# Altium PCB PCB2.PcbDoc
Units mil, origin at the board's own origin, x right, y up, seen from the top; angles counter-clockwise.
Board outline 2716.54 x 2401.57 mil, 2 copper layers (Top Layer, Bottom Layer); 22 components, 27 nets, 123 pads, 29 vias.
Unrouted connection lines stored in the file: 2.
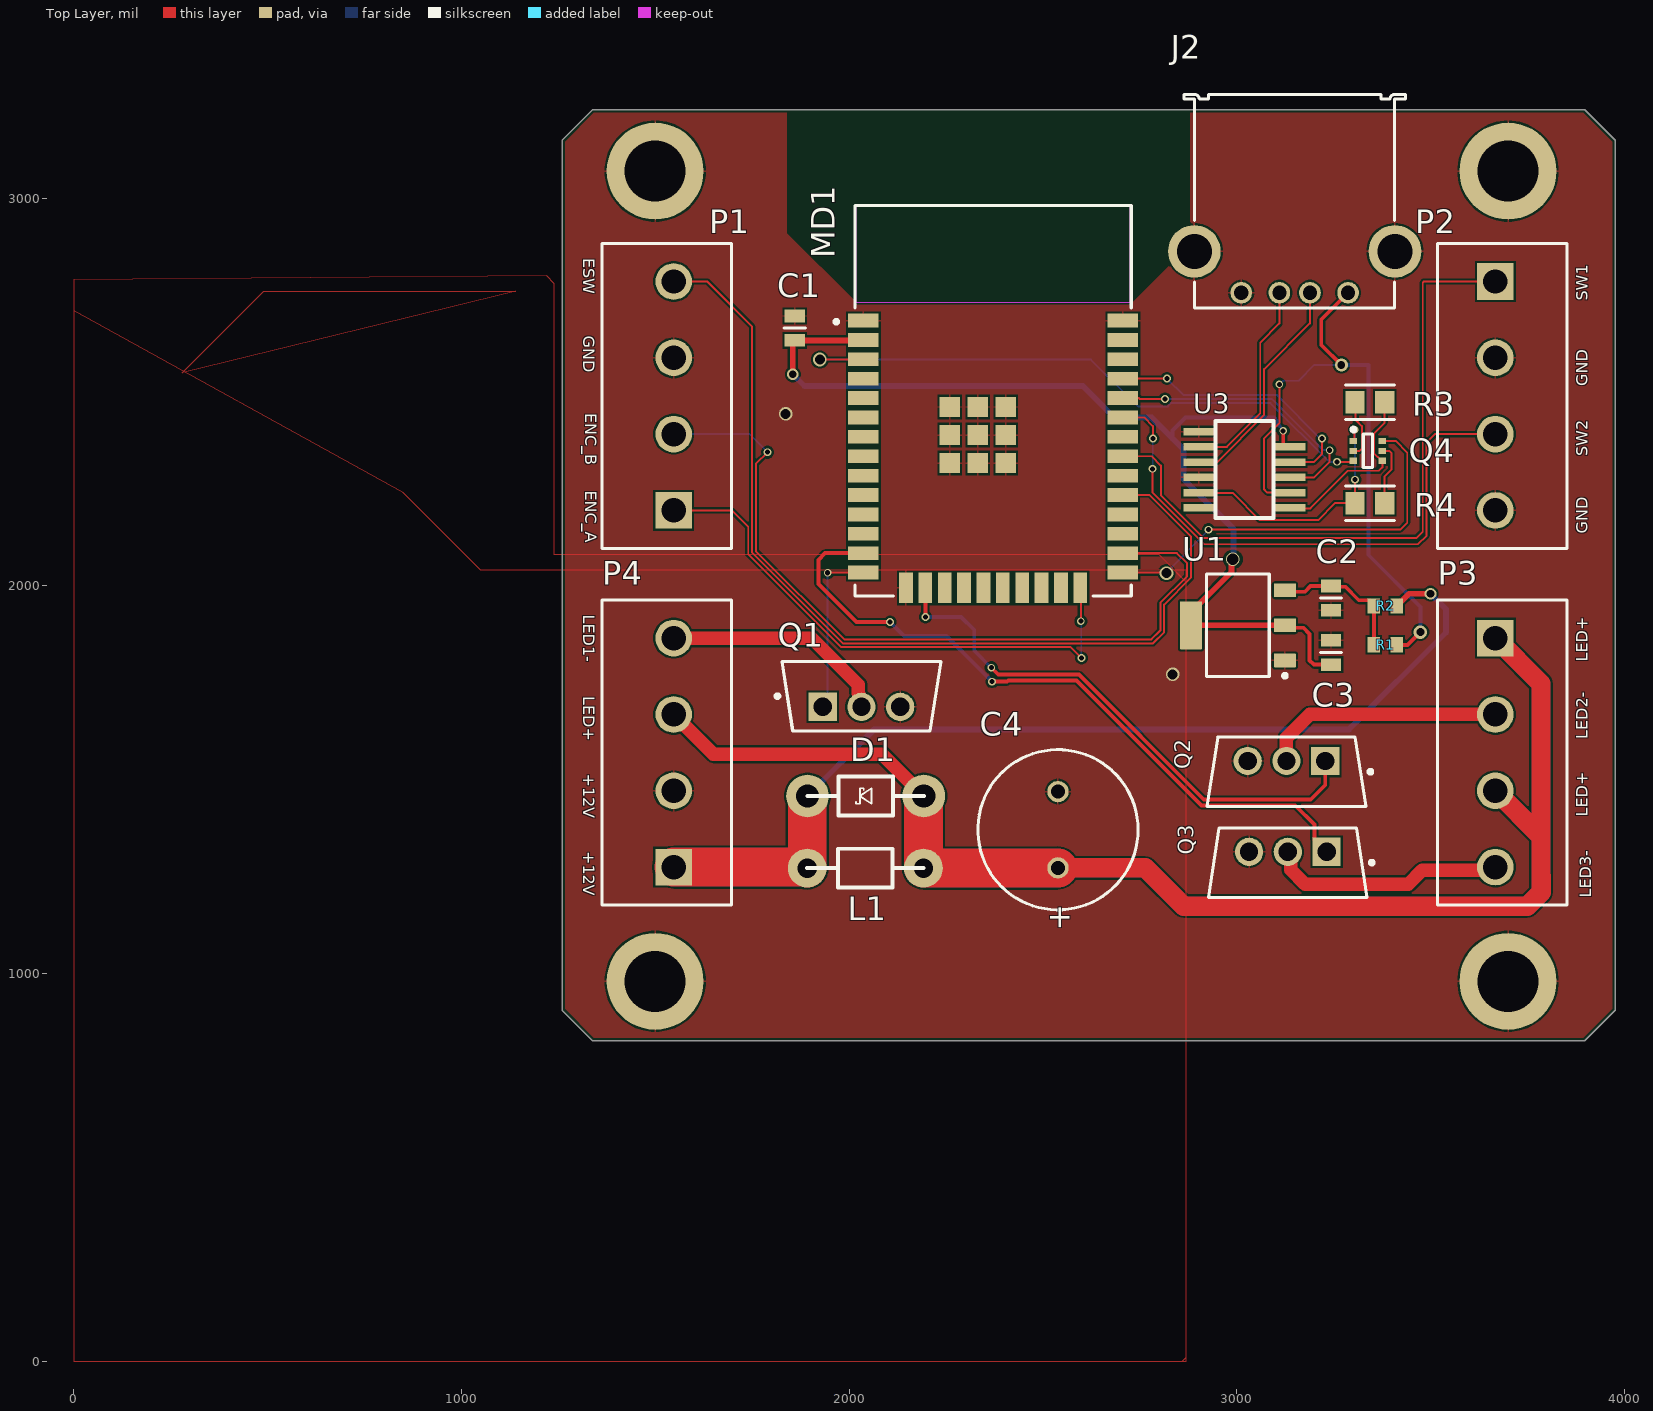
[diagram p0: Top Layer view]
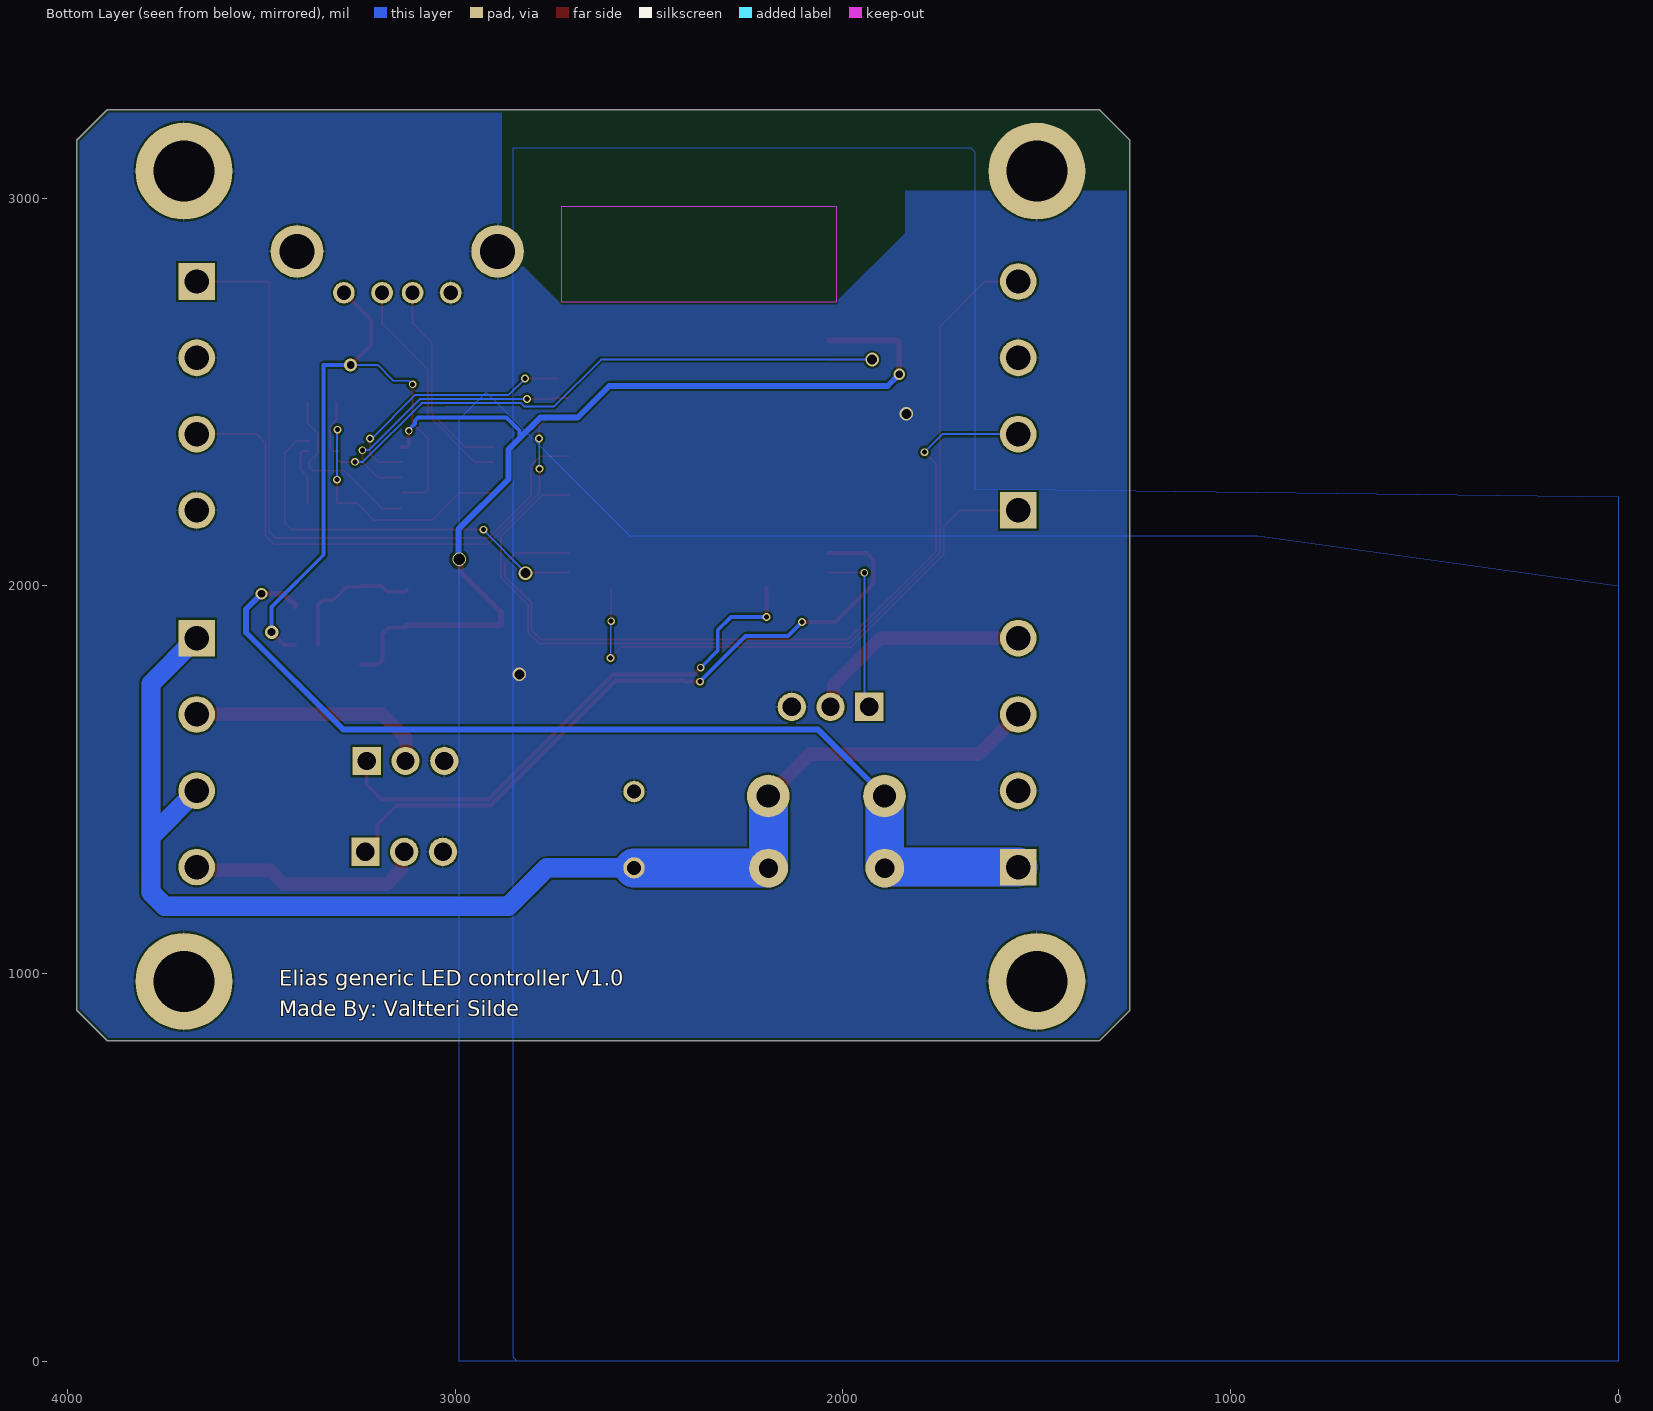
[diagram p1: Bottom Layer view, seen from below]
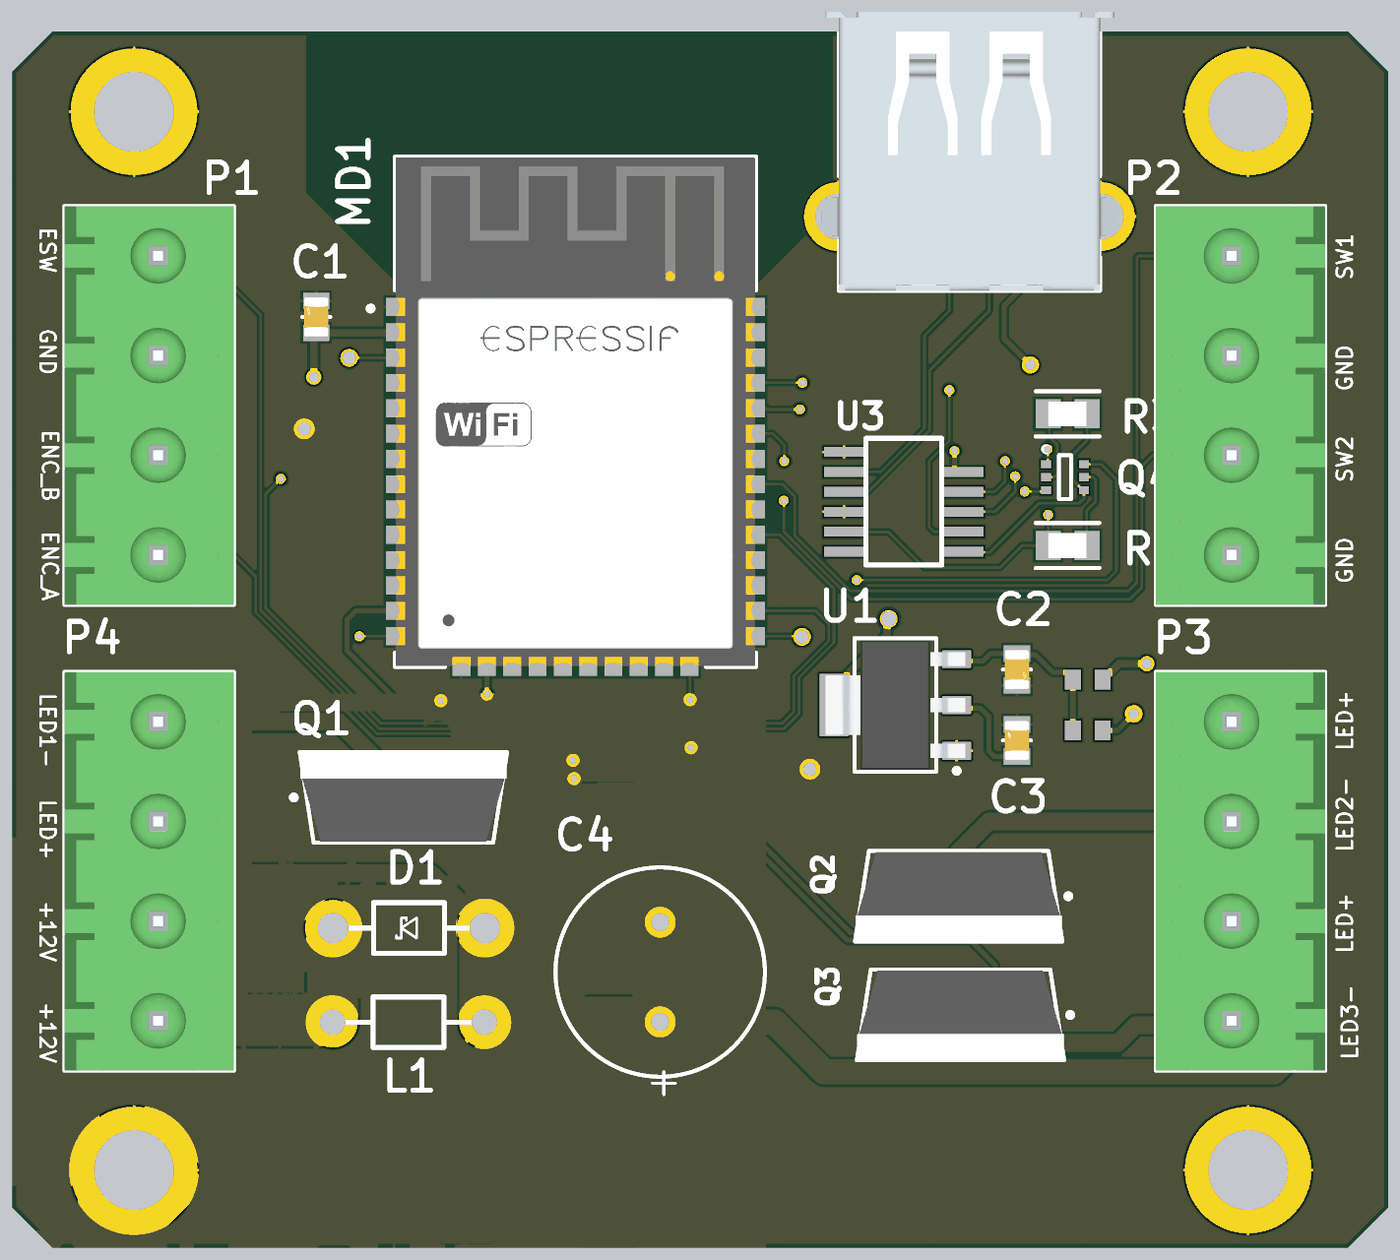
[diagram p2: 3D render of the assembled board from above, using the file's embedded part models]

## Layer stack, top to bottom
Top Solder: solder mask 0.4, Solder Resist, Dk 3.5
Top Layer: signal copper 1.4
Dielectric 1: dielectric 12.6, FR-4, Dk 4.8
Bottom Layer: signal copper 1.4
Bottom Solder: solder mask 0.4, Solder Resist, Dk 3.5

## Board outline
1259.84,3149.61 1338.58,3228.35 3897.64,3228.35 3976.38,3149.61 3976.38,905.51 3897.64,826.77 1338.58,826.77 1259.84,905.51

## Design rules (kind name [scope] priority, off if disabled: settings)
BoardOutlineClearance [All] p1: gap=7.87 ignorepadtopadclearanceinfootprint=FALSE
Clearance [All] p1: gap=5 ignorepadtopadclearanceinfootprint=FALSE except(9.84: Arc-Hole Track-Hole SMDPad-Hole THPad-Hole Via-Hole Fill-Hole Poly-Hole Region-Hole Text-Hole)
ComponentClearance [All] p1: gap=5 collisioncheckmode=3 verticalgap=5 showdistances=TRUE
DiffPairsRouting [All] p1: maxlimit=10 minlimit=5 mostfreqgap=5 toplayer_minwidth=5 toplayer_maxwidth=1000 toplayer_prefwidth=5 bottomlayer_minwidth=5 bottomlayer_maxwidth=1000 bottomlayer_prefwidth=5 maxuncoupledlength=500
Height [All] p1: minheight=0 maxheight=71497.94 prefheight=500
HoleSize [All] p1: absolutevalues=TRUE maxlimit=248.03 minlimit=11.81 maxpercent=80.000 minpercent=20.000
HoleToHoleClearance [All] p1: gap=9.84 allowstackedmicrovias=FALSE
MinimumAnnularRing [All] p1: minimumring=3
MinimumSolderMaskSliver [All] p1: minsoldermaskwidth=0
PlaneClearance [All] p1: clearance=5
PlaneConnect PlaneConnectPowerPads [InPadClass('PowerPads')] p1: planeconnectstyle=Direct reliefexpansion=20 reliefentries=4 reliefconductorwidth=10 reliefairgap=10
PlaneConnect [All] p2: pad.planeconnectstyle=Relief pad.reliefexpansion=11.81 pad.reliefentries=4 pad.reliefconductorwidth=5 pad.reliefairgap=5 via.planeconnectstyle=Direct via.reliefexpansion=11.81 via.reliefentries=4 via.reliefconductorwidth=5 via.reliefairgap=5
PolygonConnect PolygonConnectPowerPads [All vs (InPadClass('PowerPads'))] p1: connectstyle=Direct reliefconductorwidth=10 reliefentries=4 polygonreliefangle="90 Angle" airgapwidth=10
PolygonConnect [All] p2: thpad.connectstyle=Relief thpad.reliefconductorwidth=5 thpad.reliefentries=4 thpad.polygonreliefangle="90 Angle" thpad.airgapwidth=5 smdpad.connectstyle=Relief smdpad.reliefconductorwidth=5 smdpad.reliefentries=4 smdpad.polygonreliefangle="90 Angle" smdpad.airgapwidth=5 via.connectstyle=Direct via.reliefconductorwidth=5 via.reliefentries=4 via.polygonreliefangle="90 Angle" via.airgapwidth=5
RoomDefinition Sheet2 [InComponentClass('Sheet2')] p1: confinementstyle=ConfineIn formatcopy=TRUE lockcomponents=FALSE outline 1230,1090 3230,1090 3230,2090 1230,2090
RoutingVias [All] p1: holewidth=11.81 width=23.62 viastyle="Through Hole" minholewidth=11.81 minwidth=23.62 maxholewidth=23.62 maxwidth=259.84
SilkToSilkClearance [All] p1: silktosilkclearance=0
SilkToSolderMaskClearance [IsPad] p1: minsilkscreentomaskgap=5 clearancetoexposedcopper=TRUE
SolderMaskExpansion [All] p1: expansion=2.95 istentingtop=FALSE
UnRoutedNet [All] p1: checkbadconnections=TRUE
Width [All] p1: maxlimit=1000 minlimit=5 preferedwidth=5 minimp=50.000000 maximp=50.000000 favimp=50.000000
19 further rules are at their usual default settings.

## Components (designator, comment, footprint, x,y, rotation, side; value= is the part's Value field where it differs from the comment)
C1 "CL21B106KOQNNNG" FP-CL21B106KOQNNNG-MFG 1859.92,2664.8 r90 top value=10uF
C2 "CL21B106KOQNNNG" FP-CL21B106KOQNNNG-MFG 3243.39,1968.39 r270 top value=10uF
C3 "CL21B106KOQNNNG" FP-CL21B106KOQNNNG-MFG 3243.39,1828.39 r90 top value=22uF
C4 "ECA-1HHG471" PNSC-CAP-10x20-P2 2539,1371 r90 top
D1 "15SQ045" "Shottky Diode" 2043,1458 r180 top
J2 "61400416021" 61400416021 3149.61,2992.13 r180 top
L1 "77 A-3 R 9 M-00" "FIlter Inductor" 2042,1272 r0 top
MD1 "ESP32-WROOM-32D" FP-ESP32-WROOM-32D-MFG 2371.73,2477.4 r0 top
P1 "691311700004" 691311700004 1530,2490 r90 top
P2 "691311700004" 691311700004 3685,2490 r270 top
P3 "691311700004" 691311700004 3685,1570 r270 top
P4 "691311700004" 691311700004 1530,1570 r90 top
Q1 "IRLZ44NPbF" FP-PG-TO220-3-MFG 2032,1715.76 r90 top
Q2 "IRLZ44NPbF" FP-PG-TO220-3-MFG 3128.39,1520.63 r270 top
Q3 "IRLZ44NPbF" FP-PG-TO220-3-MFG 3132,1286.24 r270 top
Q4 "BC846BDW1T1G" ONSC-SOT-363-6-419B-02_W_V 3338.39,2348.39 r0 top
R1 "RC0603JR-070RL" RESC1608X55X25ML10T15 3383.39,1848.39 r180 top
R2 "RC0603JR-070RL" RESC1608X55X25ML10T15 3383.39,1948.39 r180 top
R3 "CR0805-FX-1002ELF" FP-CR0805-IPC_A 3343.39,2473.39 r180 top
R4 "CR0805-FX-1002ELF" FP-CR0805-IPC_A 3343.39,2213.39 r180 top
U1 "CJT1117B-3.3" DCY0004A_L 3003.39,1898.39 r180 top
U3 "CH340K USB to UART bridge IC" "CH340K footprint" 3020,2280 r0 top

## Footprints (in the part's own frame and the unit in brackets; to place one, negate y for a bottom-side part, rotate by r counter-clockwise, add the part's x,y. Pads: shape width x height; smd on the part's side, far side on the other; paste and mask are expansions set on the pad)
61400416021 [mm] "USB 2.0 Type A Horizontal"
  round 1.42 hole 0.92: 1(-3.5,5.99) 2(-1,5.99) 3(1,5.99) 4(3.5,5.99)
  round 3.45 hole 2.3: Shell(-6.57,3.28) Shell(6.57,3.28)
  silkscreen extent -7.25,-7 7.25,7, body extent -8,-7 8,7, height 7.63
691311700004 [mm] "5.00mm - Open Vertical PCB Header - 04p"
  rect 2.4x2.4 hole 1.6: 1(-7.5,-0.45)
  round 2.4 hole 1.6: 2(-2.5,-0.45) 3(2.5,-0.45) 4(7.5,-0.45)
  silkscreen extent -10,-4.25 10,4.25, body extent -10,-4.25 10,4.25, height 12.1
"CH340K footprint" [mm]
  rect 2x0.5 smd: 0(-3,3) 1(-3,2) 2(-3,1) 3(-3,0) 4(-3,-1) 5(-3,-2) 6(3,-2) 7(3,-1) 8(3,0) 9(3,1) 10(3,2)
  silkscreen extent -1.91,-2.67 1.91,3.68
DCY0004A_L [mm] "SOT223, 4-Leads, Body 6.7x3.7mm, Pitch 2.3mm, IPC High Density"
  rrect11% 1.45x0.9 smd: 1(-3.075,2.3) 2(-3.075,0) 3(-3.075,-2.3)
  rrect7% 1.45x3.15 smd: 4(3.075,0)
  silkscreen extent -3.2,-3.35 2.05,3.42, body extent -3.5,-3.25 3.5,3.25, height 1.62
"FIlter Inductor" [mil] "Fastron  77 A-3 R 9 M-00"
  round 100 hole 50: 1(-150,0) 2(150,0)
  silkscreen extent -150,-50 150,50
FP-CL21B106KOQNNNG-MFG [mm]
  rect 0.825x1.325 smd paste+0 mask+0: 1(-0.8,0) 2(0.8,0)
  silkscreen extent 0,-0.7 0,0.7, body extent -1.31,-0.8 1.31,0.8, height 0.25
FP-CR0805-IPC_A [mil]
  rect 49.53x57.56 smd paste+0 mask+0: 1(-38.46,0) 2(38.46,0)
  silkscreen extent -63,-45 63,45, body extent -83,-48 83,48, height 10
FP-ESP32-WROOM-32D-MFG [mm]
  rect 2x0.9 smd paste+0 mask+0: 1(-8.5,5.26) 2(-8.5,3.99) 3(-8.5,2.72) 4(-8.5,1.45) 5(-8.5,0.18) 6(-8.5,-1.09) 7(-8.5,-2.36) 8(-8.5,-3.63) 9(-8.5,-4.9) 10(-8.5,-6.17) 11(-8.5,-7.44) 12(-8.5,-8.71) 13(-8.5,-9.98) 14(-8.5,-11.25) 25(8.5,-11.25) 26(8.5,-9.98) 27(8.5,-8.71) 28(8.5,-7.44) 29(8.5,-6.17) 30(8.5,-4.9) 31(8.5,-3.63) 32(8.5,-2.36) 33(8.5,-1.09) 34(8.5,0.18) 35(8.5,1.45) 36(8.5,2.72) 37(8.5,3.99) 38(8.5,5.26)
  rect 0.9x2 smd paste+0 mask+0: 15(-5.715,-12.25) 16(-4.445,-12.25) 17(-3.175,-12.25) 18(-1.905,-12.25) 19(-0.635,-12.25) 20(0.635,-12.25) 21(1.905,-12.25) 22(3.175,-12.25) 23(4.445,-12.25) 24(5.715,-12.25)
  rect 1.33x1.33 smd paste+0 mask+0: 39(-2.835,-4.075) 39(-2.835,-2.24) 39(-2.835,-0.405) 39(-1,-4.075) 39(-1,-2.24) 39(-1,-0.405) 39(0.835,-4.075) 39(0.835,-2.24) 39(0.835,-0.405)
  Keep-Out Layer region: -9,6.45 9,6.45 9,12.75 -9,12.75
  Keep-Out Layer region: -9,6.45 9,6.45 9,12.75 -9,12.75
  silkscreen extent -10.4,-12.8 9.05,12.8, body extent -9.6,-13.35 9.6,12.9, height 0.25
FP-PG-TO220-3-MFG [mm]
  rect 1.85x1.85 hole 1.2 paste-1000 mask+0: 1(-0.705,2.54)
  round 1.85 hole 1.2 paste-1000 mask+0: 2(-0.705,0) 3(-0.705,-2.54)
  silkscreen extent -2.27,-5.2 2.27,5.62, body extent -2.37,-5.55 2.37,5.55, height 0.25
ONSC-SOT-363-6-419B-02_W_V [mm] "SOT23, 6-Leads, Body 2x1.25mm, Pitch 0.65mm"
  rect 0.5x0.4 smd: 1(-0.95,0.65) 2(-0.95,0) 3(-0.95,-0.65) 4(0.95,-0.65) 5(0.95,0) 6(0.95,0.65)
  silkscreen extent -1.07,-1.1 0.3,1.52, body extent -0.63,-1 0.63,1, height 1.1
PNSC-CAP-10x20-P2 [mm] "THD, 2-Leads, Dia 10.5mm, Body Length 22mm, Pin Spacing 5mm"
  round 1.4 hole 0.9: 1(-2.5,0) 2(2.5,0)
  silkscreen extent -5.25,-5.25 5.25,5.25, body extent -5.25,-5.25 5.25,5.25, height 22
RESC1608X55X25ML10T15 [mm] "Chip Resistor, 2-Leads, Body 1.60x0.80mm, IPC Low Density"
  rect 0.8x1 smd: 1(-0.75,0) 2(0.75,0)
  body extent -0.85,-0.45 0.85,0.45, height 0.55
"Shottky Diode" [mil] "Diotec 15SQ045"
  round 110 hole 60: 1(-150,0) 2(150,0)
  silkscreen extent -150,-50 150,50

## Part data
C1: library part CMP-13271-000015-1, "CAP CER 10UF 16V X7R 0805", Capacitance=100nF, Manufacturer="Samsung Electro-Mechanics", Package=0, Temperature="-55°C to +125°C", Temperature Characteristic=X7R, Temperature Coefficient=15%, Temperature Range High=+125°C, Temperature Range Low=-55°C, Tolerance=10%, Voltage Rating=16V, Automotive=No, Category=Cap, ComponentLink2Description=Datasheet, ComponentLink2URL=http://product.samsungsem.com/mlcc/CL21B106KOQNNN.do, Device Class L1="Passive Components", Device Class L2=Capacitors, Device Class L3="Ceramic Capacitors", Digikey Description="CAP CER 10UF 16V X7R 0805", Height=1.4mm, Ipc Land Pattern Name=CAPC200125X125, Lead Free=Yes, Manufacturer Part Number=CL21B106KOQNNNG, Material=Ceramic, Octopart=https://octopart.com/cl21b106koqnnng-samsung-19995691, RoHS=TRUE
C2: library part CMP-13271-000015-1, "CAP CER 10UF 16V X7R 0805", Capacitance=10uF, Manufacturer="Samsung Electro-Mechanics", Package=0, Temperature="-55°C to +125°C", Temperature Characteristic=X7R, Temperature Coefficient=15%, Temperature Range High=+125°C, Temperature Range Low=-55°C, Tolerance=10%, Voltage Rating=16V, Automotive=No, Category=Cap, ComponentLink2Description=Datasheet, ComponentLink2URL=http://product.samsungsem.com/mlcc/CL21B106KOQNNN.do, Device Class L1="Passive Components", Device Class L2=Capacitors, Device Class L3="Ceramic Capacitors", Digikey Description="CAP CER 10UF 16V X7R 0805", Height=1.4mm, Ipc Land Pattern Name=CAPC200125X125, Lead Free=Yes, Manufacturer Part Number=CL21B106KOQNNNG, Material=Ceramic, Octopart=https://octopart.com/cl21b106koqnnng-samsung-19995691, RoHS=TRUE
C3: library part CMP-13271-000015-1, "CAP CER 10UF 16V X7R 0805", Capacitance=22uF, Manufacturer="Samsung Electro-Mechanics", Package=0, Temperature="-55°C to +125°C", Temperature Characteristic=X7R, Temperature Coefficient=15%, Temperature Range High=+125°C, Temperature Range Low=-55°C, Tolerance=10%, Voltage Rating=16V, Automotive=No, Category=Cap, ComponentLink2Description=Datasheet, ComponentLink2URL=http://product.samsungsem.com/mlcc/CL21B106KOQNNN.do, Device Class L1="Passive Components", Device Class L2=Capacitors, Device Class L3="Ceramic Capacitors", Digikey Description="CAP CER 10UF 16V X7R 0805", Height=1.4mm, Ipc Land Pattern Name=CAPC200125X125, Lead Free=Yes, Manufacturer Part Number=CL21B106KOQNNNG, Material=Ceramic, Octopart=https://octopart.com/cl21b106koqnnng-samsung-19995691, RoHS=TRUE
C4: library part CMP-2000-05308-1, "Aluminum Electrolytic Capacitor, 470 uF, +/- 20%, 50 V, -55 to 105 degC, 2-Pin THD, RoHS, Bulk", Capacitance=470µF, Case Size/Dimension=Ø10x20mm, Lifetime@Temperature=2000Hrs@105degC, Manufacturer=Panasonic, Operating Temp Range=-55to+105degC, Operating Temp-Max=105degC, Package Description="2-Pin Through Hole Device, Dia 10 mm, Body Length 20 mm, Pin Spacing 5 mm", Package Reference=CAP-10x20-P2, Package Version=Nov-12, Rated Voltage=50V, Ripple Current=530mA, Datasheet URL=http://www.alliedelec.com/images/products/datasheets/bm/Panasonic/70067776.pdf, Datasheet Version=Nov-12, Manufacturer URL=http://www.panasonic.com/, Package URL=http://www.alliedelec.com/images/products/datasheets/bm/Panasonic/70067776.pdf, Series=NHG, Type=Radial
D1: "Diotec 15SQ045", Current=15A, Voltage=45V
J2: library part CMP-1502-03227-1, "USB 2.0 Type A Receptacle WR-COM, Horizontal, THT", Contact Resistance=20mOhm, Manufacturer="Wurth Elektronik", Operating Temperature=-40to105degC, Rated Current=1.5A, Working Voltage=30VAC, Connector Type=USB2.0TypeA, Datasheet URL=https://katalog.we-online.de/em/datasheet/61400416021.pdf, Gender=Receptacle, Manufacturer URL=http://www.we-online.de, Mounting Technology=THT, Orientation=Horizontal, Package Reference=61400416021, Packaging=Tray, Part Number=61400416021, Publisher=WurthElektronik
L1: "Fastron 77 A-3 R 9 M-00", Inductance=3.9uH, Max Current=12A, Tolerance=+-20%
MD1: library part CMP-194065-000003-1, "WIFI MODULE 32MBITS SPI FLASH", Manufacturer="Espressif Systems", Max Frequency=2484MHz, Max Supply Voltage=3.6V, Min Supply Voltage=3V, Nominal Supply Current=500mA, Temperature="-40°C to +85°C", Temperature Range High=+85°C, Temperature Range Low=-40°C, Automotive=No, Bandwidth=72MHz, Category=UNK, ComponentLink2Description=Datasheet, ComponentLink2URL=https://www.espressif.com/sites/default/files/documentation/esp32-wroom-32d_esp32-wroom-32u_datasheet_en.pdf, Data Rate=150Mbits/s, Device Class L1="Integrated Circuits (ICs)", Device Class L2="RF Semiconductors and Devices", Device Class L3=Transceivers, Digikey Description="WIFI MODULE 32MBITS SPI FLASH", Height=3.2mm, Interface=I2C,SPI,UART,Ethernet,I2S,Other, Lead Free=Yes, Manufacturer Part Number=ESP32-WROOM-32D, Mouser Description="Wi-Fi/BT BLE Module ESP32-D0WD, SPI Flash, UART, P", Number Of Adc Channels=16, Number Of Gpio=32, Octopart=https://octopart.com/esp32-wroom-32d-espressif+systems-91040050, Package=ESP32-WROOM-32D, RoHS=TRUE, Sensitivity=-98dBm
P1 P2 P3 P4: library part CMP-1502-02028-1, "Serie 3117 - 5.00mm Open Vertical PCB Header WR-TBL, 4 pin, LCSC: DB128V-5.08-4P-GN-S", Manufacturer="Wurth Elektronik", Operating Temperature=-40to105degC, Datasheet URL=http://katalog.we-online.de/em/datasheet/6913117000xx.pdf, Gender=Male, Manufacturer URL=http://www.we-online.de, Mounting Technology=THT, Package Reference=691311700004, Packaging=Box, Part Number=691311700004, Pin Number=4, Pitch=5.00mm, Publisher=WurthElektronik
Q1 Q2 Q3: library part CMP-32901-000488-1, "MOSFET N-CH 55V 47A TO220AB", Case/Package=TO-220, Continuous Drain Current (ID)=47A, Drain to Source Breakdown Voltage=55V, Drain to Source Resistance=35mR, Gate to Source Voltage (Vgs)=16V, Input Capacitance=1.7nF, Max Operating Temperature=175°C, Max Power Dissipation=110W, Min Operating Temperature=-55°C, Threshold Voltage=2V, Drain to Source Voltage (Vdss)=55V, Element Configuration=Single, Halogen Free="Halogen Free", Height=0.6inch, Lead Free="Lead Free", Length=0.414inch, Max Dual Supply Voltage=55V, Mount="Through Hole", Number of Pins=3, Packaging=Rail/Tube, Power Dissipation=110W, Rds On Max=22mR, REACH SVHC="No SVHC", RoHS Compliant=Yes, Turn-Off Delay Time=26ns, Turn-On Delay Time=11ns, Width=0.185inch
Q4: library part CMP-1048-00850-1, "Dual General Purpose Transistors, NPN, 6-Pin SOT-363, Pb-Free, Tape and Reel", Manufacturer="On Semiconductor", ComponentLink1Description="Manufacturer URL", ComponentLink1URL=http://www.onsemi.com/, ComponentLink2Description=Datasheet, ComponentLink2URL=http://www.onsemi.cn/pub_link/Collateral/BC846BDW1T1-D.PDF, ComponentLink3Description="Package Specification", ComponentLink3URL=http://www.onsemi.com/pub_link/Collateral/NTJD4001N-D.PDF, DatasheetVersion="Rev. 9", fT Min (MHz)=100, IC Continuous (A)=0.1, Mounting Technology="Surface Mount", PackageDescription="6-Pin Small Outline Transistor, Body 2 x 1.25 mm, Pitch 0.65 mm", PackageReference=SOT-363-6-419B-02_W, PackageVersion="Rev. W, 01/2006", Packing="Tape and Reel", PartNumber=BC846BDW1T1G, Polarity="Dual NPN", RoHS=TRUE
R1 R2: library part CMP-2100-03667-1, "Chip Resistor, 0 Ohm, +/- 5%, 0.1 W, -55 to 155 degC, 0603 (1608 Metric), RoHS, Tape and Reel", Case Code (Imperial)=0603, Case Code (Metric)=1608, Manufacturer=Yageo, Max Operating Temperature=155degC, Min Operating Temperature=-55degC, Package Description="2-Pin Surface Mount Device, Body 1.6 x 0.8 mm", Package Quantity=5000, Power Rating=100mW, Resistance=0mOhm, Temperature Coefficient=200ppm/degreesC, Tolerance=5%, Voltage Rating=50V, Case/Package=0603, Composition=ThickFilm, Contact Plating=Tin, Datasheet URL=http://www.yageo.com/NewPortal/yageodocoutput?fileName=/pdf/R-Chip/PYu-RC_Group_51_RoHS_L_5.pdf, Datasheet Version="Rev. 5, 10/2016", Depth=0.8mm, Height=0.45mm, Lead Free=LeadFree, Length=1.6mm, Manufacturer URL=http://www.yageo.com/, Military Standard=Not, Number of Pins=2, Package Reference=0603, Packaging=TapeandReel, Radiation Hardening=No, REACH SVHC=NoSVHC, RoHSCompliant=true, Termination=SMD/SMT, Voltage Rating (DC)=50V, Width=0.8mm
R3 R4: library part CMP-07231-003204-1, "Thick Film Chip Resistors 0805 10kΩ 0.125W 1% 100ppm/°C", Case Code (Imperial)=0805, Case Code (Metric)=2012, Max Operating Temperature=155°C, Max Power Dissipation=125mW, Min Operating Temperature=-55°C, Package Quantity=1, Resistance=10kR, Temperature Coefficient=100ppm/°C, Tolerance=1%, Voltage Rating=150V, Voltage Rating (DC)=100V, Case/Package=0805, Composition="Thick Film", Contact Plating=Tin, Depth=1.25mm, Features="Moisture Resistant", Height=0.5mm, Length=2mm, Mount="Surface Mount", Number of Terminations=2, Packaging="Tape and Reel", Power Rating=125mW, Radiation Hardening=No, REACH SVHC="No SVHC", Termination=SMD/SMT, Thickness=508um, Width=1.25mm
U1: library part CMP-0395-00527-2, "75dB@(120Hz) 1A 1.3V@(1A) Fixed 3.3V~3.3V Positive 1 15V SOT-223 Linear Voltage Regulators (LDO) ROHS", Rating=Catalog, Code_JEDEC=TO-261, ComponentLink1Description="Manufacturer URL", ComponentLink1URL=http://www.ti.com/, ComponentLink2Description=Datasheet, ComponentLink2URL=https://datasheet.lcsc.com/lcsc/2108131530_Jiangsu-Changjing-Electronics-Technology-Co---Ltd--CJT1117B-3-3_C78777.pdf, ComponentLink3Description="Package Specification", ComponentLink3URL=http://www.ti.com/litv/pdf/mpds094a, DatasheetVersion=SBVS001D, Eco-Plan="Green (RoHS & no Sb/Br)", Fixed Output Options(V)=3.3, Iout(Max)(A)=0.8, Iq(Typ)(mA)=4, Mounting Technology="Surface Mount", PackageDescription="4-Pin Plastic Small Outline, Body 3.5 x 6.5 mm, Pitch 2.3 mm", PackageReference=DCY0004A, PackageVersion=4202506/B, PartNumber=CJT1117B-3.3, SubFamily="Single Channel LDO", Vdo(Typ)(mV)=1100, Vin(Max)(V)=15, Vin(Min)(V)=3.8, Vout Adj(Max)(V)=2.8, Vout Adj(Min)(V)=2.8
U3: library part CH340K

## Free pads (board coordinates)
  round 250 hole 157.48: 3(1500,980) 3(1500,3070) 3(3700,980) 3(3700,3070)

## Via types
v1: diameter 20, hole 13, Top Layer to Bottom Layer, 20 vias
v2: diameter 35, hole 26, Top Layer to Bottom Layer, 4 vias
v3: diameter 30, hole 20, Top Layer to Bottom Layer, 2 vias
v4: diameter 35, hole 30, Top Layer to Bottom Layer, 1 vias
v5: diameter 35, hole 20, Top Layer to Bottom Layer, 1 vias
v6: diameter 34, hole 20, Top Layer to Bottom Layer, 1 vias

## Nets (pads, with @x,y where several pads share a name; then routed paths per layer and width w, separated by ;. In a path a pad name is that pad's centre, name@x,y a point inside that pad or via, vN(x,y) a via of type N, cw(c..) or ccw(c..) an arc to the next point about the centre after c; other vN are vias at no path point)
+3V3: C1.1 C3.1 MD1.2 U1.2 U1.4 U3.10 | length 2746.7
  Top Layer w10: MD1.2@2035.91,2633.31 MD1.2 ; v1(3120,2400) 3120,2363.58 3124.84,2358.74 U3.10 ; U1.2 3130.83,1892 3172,1892 3188,1876 3188,1808 3199.11,1796.89 C3.1
  Top Layer w15: v3(1855,2546) 1855,2628.39 C1.1 MD1.2@2035.91,2633.31 ; v4(2990.3,2068.39) 2986.48,2064.56 2986.48,2036 2882.32,1931.85 U1.4 U1.2
  Bottom Layer w10: 2834.61,2380.61 2834.61,2400.61 2868,2434 3096,2434 3103.94,2426.06 3103.94,2418.76 3120,2402.71 v1(3120,2400)
  Bottom Layer w15: v3(1855,2546) 1885,2516 2603,2516 2684.89,2434.11 2781.11,2434.11 2834.61,2380.61 2863,2352.21 2863,2275 2992.13,2145.87 2992.13,2070.21 v4(2990.3,2068.39)
+12: D1.2 L1.1 P4.1 R2.1 | length 3104.5
  Top Layer w15: R2.1 3412.91,1952.32 3421.16,1960.57 3425.1,1960.57 3444.53,1980 v3(3500,1980)
  Top Layer w100: P4.1 1889.28,1274.72 L1.1 1892,1457 D1.2
  Bottom Layer w15: D1.2 2065,1630 3290,1630 3540,1880 3540,1940 v3(3500,1980)
  Bottom Layer w100: P4.1 1889.28,1274.72 L1.1 1892,1457 D1.2
DTR: Q4.1 R4.2 U3.4 | length 671.9
  Top Layer w5: U3.4 2902.52,2240 2990,2240 3060,2170 3210,2170 3253.39,2213.39 R4.2 3304.92,2272.92 v1@3305,2273 ; Q4.1@3304,2373.98 v1(3304,2403)
  Bottom Layer w5: v1(3305,2274) v1@3305,2407
EN: MD1.3 Q4.3 | length 1606.1
  Top Layer w5: v2(1925,2584) 2036.6,2584 MD1.3 ; v1(3259,2320) 3298.19,2320 Q4.3
  Bottom Layer w5: v2(1925,2584) 2624,2584 2744.84,2463.16 2822.8,2463.16 2831.65,2472 3025.86,2472 3026.24,2471.62 3086.74,2471.62 3238.35,2320 v1(3259,2320)
ENC_A: MD1.24 P1.1 | length 1433.6
  Top Layer w5: P1.1 1697.28,2194.72 1740,2152 1740,2081.72 1979.72,1842 2572,1842 v1(2600,1814) ; MD1.24 2598,1993.85 v1(2598,1909)
  Bottom Layer w5: v1(2598,1909) 2599,1908 2599,1815 v1(2600,1814)
ENC_B: MD1.26 P1.2 | length 2054.1
  Top Layer w5: v1(1790,2345) 1760,2315 1760,2090 1988,1862 2780,1862 2803,1885 2803,1956.14 2872,2025.14 2872,2058 2845.51,2084.49 MD1.26
  Bottom Layer w5: P1.2 1743.43,2391.57 v1(1790,2345)
GND: C1.2 C2.2 C3.2 C4.2 J2.4 J2.Shell MD1.1 MD1.15 MD1.38 MD1.39 P1.3 P2.2 P2.4 P4.2 pad.3 Q1.3 Q2.3 Q3.3 U1.1 U3.0 U3.3
  other v2: 2834.65,1771.65 1836.27,2443.7
IO0: MD1.25 Q4.6 | length 1044.9
  Top Layer w5: MD1.25 v2@2818.49,2034.49 ; v1@2929,2145 3422,2145 3440,2163 3440,2344 3410.02,2373.98 Q4.6
  Bottom Layer w5: v2(2819,2033) 2819,2035 2927,2143 v1(2927,2145)
LED1-: P4.4 Q1.2 | length 587
  Top Layer w15: Q1.2@2024.08,1695.92 Q1.2
  Top Layer w35: P4.4 1903.72,1865.28 2024.08,1744.92 2024.08,1722.67 2024.76,1721.99 2024.76,1696.6 Q1.2@2024.08,1695.92
LED1_CTRL: MD1.14 Q1.1 | length 443.7
  Top Layer w5: v1(1945,2034) 1945.49,2034.49 MD1.14
  Bottom Layer w5: Q1.1 1945,1701 v1(1945,2034)
LED2-: P3.2 Q2.2 | length 623.8
  Top Layer w35: Q2.2 3128.39,1608.39 3188.43,1668.43 P3.2
LED2_CTRL: MD1.16 Q2.1 | length 1410.2
  Top Layer w10: MD1.16 2197.06,1994.79 v1(2197.06,1920) ; v1(2367,1789) 2385,1771 2593,1771 2915,1449 3191,1449 3228.39,1486.39 Q2.1
  Bottom Layer w10: v1(2197.06,1920) 2289,1920 2323,1886 2323,1833 v1(2367,1789)
LED3-: P3.4 Q3.2 | length 610.9
  Top Layer w35: Q3.2 3139.24,1306.76 3139.24,1267.76 3176.4,1230.6 3442.52,1230.6 3478.24,1266.33 3658.89,1266.33 P3.4
LED3_CTRL: MD1.13 Q3.1 | length 1807.9
  Top Layer w10: MD1.13 1938.49,2084.49 1921,2067 1921,2005 2019,1907 v1(2106,1907) ; v1(2369,1753) 2408,1753 2411,1756 2586.79,1756 2908.79,1434 3151,1434 3200.58,1384.42 3200.58,1345.42 Q3.1
  Bottom Layer w10: v1(2106,1907) 2142,1871 2251,1871 v1(2369,1753)
LED+: C4.1 D1.1 L1.2 P3.1 P3.3 P4.3 | length 6145.7
  Top Layer w35: P4.3 1650.14,1566 2085,1566 D1.1
  Top Layer w50: C4.1 2764.43,1272.57 2863,1174 3750,1174 3785.29,1209.29 3785.29,1250.71 3785,1251 3785,1353.86 ; P3.3 3785,1353.86 ; P3.1 3785,1747.56 3785,1353.86
  Top Layer w100: D1.1 2192,1457 L1.2 2538.43,1272 C4.1
  Bottom Layer w50: C4.1 2764.43,1272.57 2863,1174 3750,1174 3785,1209 3785,1353.86 ; P3.3 3785,1353.86 ; P3.1 3785,1747.56 3785,1353.86
  Bottom Layer w100: D1.1 2192,1457 L1.2 2538.43,1272 C4.1
NetC2_1: C2.1 R1.2 R2.2 U1.3 | length 360
  Top Layer w10: U1.3 3128.39,1985 3176,1985 3190.88,1999.88 C2.1 ; C2.1@3243.39,1998 3280,1998 3315,1963 3343.11,1963 3353.86,1952.25 R2.2 R1.2
NetQ4_2: Q4.2 R3.2 | length 150.4
  Top Layer w5: Q4.2 3317.39,2348.39 3323,2354 3323,2412 3307,2428 R3.2@3307,2473.39
NetQ4_4: Q4.4 R3.1 U3.6 | length 471.8
  Top Layer w5: U3.6 3139.37,2200 3190,2200 3287,2297 3367,2297 3375.79,2305.79 Q4.4 3373.82,2322.8 3363.6,2333.01 3362.84,2333.01 3354,2341.85 3354,2393 3381.85,2420.85 R3.1
NetQ4_5: Q4.5 R4.1 | length 162.9
  Top Layer w5: Q4.5 3393.61,2348.39 3399,2343 3399,2300 3381,2282 3381,2214.24 R4.1
RXD: MD1.34 U3.8 | length 737.8
  Top Layer w5: MD1.34 2747.51,2484.49 2750,2482 v1(2815,2482) ; U3.8 3200,2280 3240,2320 v1(3240,2350)
  Bottom Layer w5: v1(2815,2482) 3091.35,2482 3222.5,2350.85 3239.15,2350.85 v1(3240,2350)
SW1: MD1.31 P2.1 | length 1743.4
  Top Layer w5: MD1.31 2780.51,2334.49 2804.52,2310.48 2804.52,2233.48 2914,2124 3464,2124 3480,2140 3480,2782.35 3482.93,2785.28 P2.1
SW2: MD1.33 P2.3 | length 1454.3
  Top Layer w5: MD1.33 2761.51,2434.49 2784,2412 v1@2784,2382 ; v1(2783,2302) 2783,2240.86 2916.39,2107.47 3467.47,2107.47 3490,2130 3490,2370 3511.57,2391.57 P2.3
  Bottom Layer w5: v1(2783,2302) 2783.5,2302.5 2783.5,2379.5 v1(2784,2380)
SWE: MD1.29 P1.4 | length 2500.7
  Top Layer w5: P1.4 1633.72,2785.28 1750,2669 1750,2085.86 1983.86,1852 2784.14,1852 2813,1880.86 2813,1952 2882,2021 2882,2127.72 2775.23,2234.49 MD1.29
TXD: MD1.35 U3.9 | length 679.6
  Top Layer w5: MD1.35@2735,2535 v1(2820,2535) ; U3.9 3199.37,2319.37 3220,2340 v1(3220,2380)
  Bottom Layer w5: v1(2820,2535) 2863,2492 3104.14,2492 3216.14,2380 v1(3220,2380)
USB+: J2.1 R1.1 U3.7 | length 1662.7
  Top Layer w5: v1(3110,2520) 3110,2420 3070,2380 3070,2250 3079.37,2240.63 U3.7
  Top Layer w10: v6(3270,2570) 3218.19,2621.81 3218.19,2687.09 J2.1 ; R1.1@3412.91,1848 3441,1848 v5(3474,1881)
  Bottom Layer w5: v1(3110,2520) 3111.12,2520 3120.43,2529.31 3160,2529.31 3200.69,2570 v6(3270,2570)
  Bottom Layer w10: v6(3270,2570) 3340,2570 3340,2083 ; 3339.49,2080.51 3474,1946 v5(3474,1881)
USB_D+: J2.3 U3.1 | length 526.4
  Top Layer w5: U3.1 2974.52,2358.74 3060.87,2445.09 3060.87,2627.8 3110.24,2677.17 J2.3
USB_D-: J2.2 U3.2 | length 583.6
  Top Layer w5: U3.2 2949.29,2319.37 3070.87,2440.94 3070.87,2559.06 3188.98,2677.17 J2.2
pads on no net: MD1.4 MD1.5 MD1.6 MD1.7 MD1.8 MD1.9 MD1.10 MD1.11 MD1.12 MD1.17 MD1.18 MD1.19 MD1.20 MD1.21 MD1.22 MD1.23 MD1.27 MD1.28 MD1.30 MD1.32 MD1.36 MD1.37 U3.5

## Polygon pours and split planes (outlines as drawn)
GND on Bottom Layer "GND_L02_P006" (solid, pour order 6): 2720,4330 2720,3020 1230,3020 1230,700 4050,700 4050,4270 3980,4340
GND on Bottom Layer "GND" (none, shelved, pour order 4): 0,2230 0,0 2840,0 2850,10 2850,3130 1670,3130 1660,3120 1660,2250
no net on Bottom Layer "NONET_L02_P000" (solid, shelved, pour order 0): 0,2000 0,0 2990,0 2990,2430 2920,2500 2550,2130 930,2130
GND on Top Layer "GND_L01_P007" (solid, pour order 7): 1230,4150 1181.1,748.03 4050,674.41 4050,1220 4050,3220 2200,3220 2090,3330 2090,4130
GND on Top Layer "GND" (none, shelved, pour order 3): 0,2790 0,0 2870,0 2870,2010 2800,2080 1240,2080 1240,2780 1220,2800
GND on Top Layer "GND" (solid, shelved, pour order 2): 280,2550 490,2760 1140,2760
GND on Top Layer "GND" (solid, shelved, pour order 1): 0,2710 0,0 2860,0 2870,10 2870,2040 1050,2040 850,2240

## Other copper
Top Layer:
  pour cut-out: 2020,2730 1840,2910 1840,3350 2850,3350 2880,3320 2880,2880 2730,2730
Bottom Layer:
  pour cut-out: 2020,2730 2730,2730 2880,2880 2880,3370 1920,3370 1840,3290 1840,2910

## Silkscreen, mask and mechanical layers (free items; w line width, h text height)
Top Overlay:
  text "ESW" at 1315,2845 h30 r270
  text "SW1" at 3905,2735 h30 r90
  text "GND" at 1315,2645 h30 r270
  text "GND" at 3905,2515 h30 r90
  text "ENC_B" at 1320,2445 h30 r270
  text "SW2" at 3905,2335 h30 r90
  text "ENC_A" at 1320,2245 h30 r270
  text "GND" at 3905,2135 h30 r90
  text "LED1-" at 1315,1925 h30 r270
  text "LED+" at 3905,1805 h30 r90
  text "LED+" at 1315,1715 h30 r270
  text "LED2-" at 3905,1605 h30 r90
  text "+12V" at 1315,1515 h30 r270
  text "LED+" at 3905,1405 h30 r90
  text "+12V" at 1315,1315 h30 r270
  text "LED3-" at 3915,1195 h30 r90
Bottom Overlay:
  text "Elias generic LED controller V1.0" at 3454.57,968.21 h40
  text "Made By: Valtteri Silde" at 3454.57,889.47 h40
Mechanical 1:
  the board outline again, w10

## Text inside footprints (layer, text, board x,y; h text height)
C4: Top Overlay "+" at 2569,1111 h59.06 r90
J2: Mechanical 2 "PCB Edge" at 3236.22,3315.75 h32 r180